# Altium PCB RFD900X Holder.PcbDoc
Units mm, origin at the board's own origin, x right, y up, seen from the top; angles counter-clockwise.
Board outline 30 x 35.1 mm, 2 copper layers (Top Layer, Bottom Layer), stack 1.1 mm thick; 16 components, 18 nets, 79 pads, 89 vias.
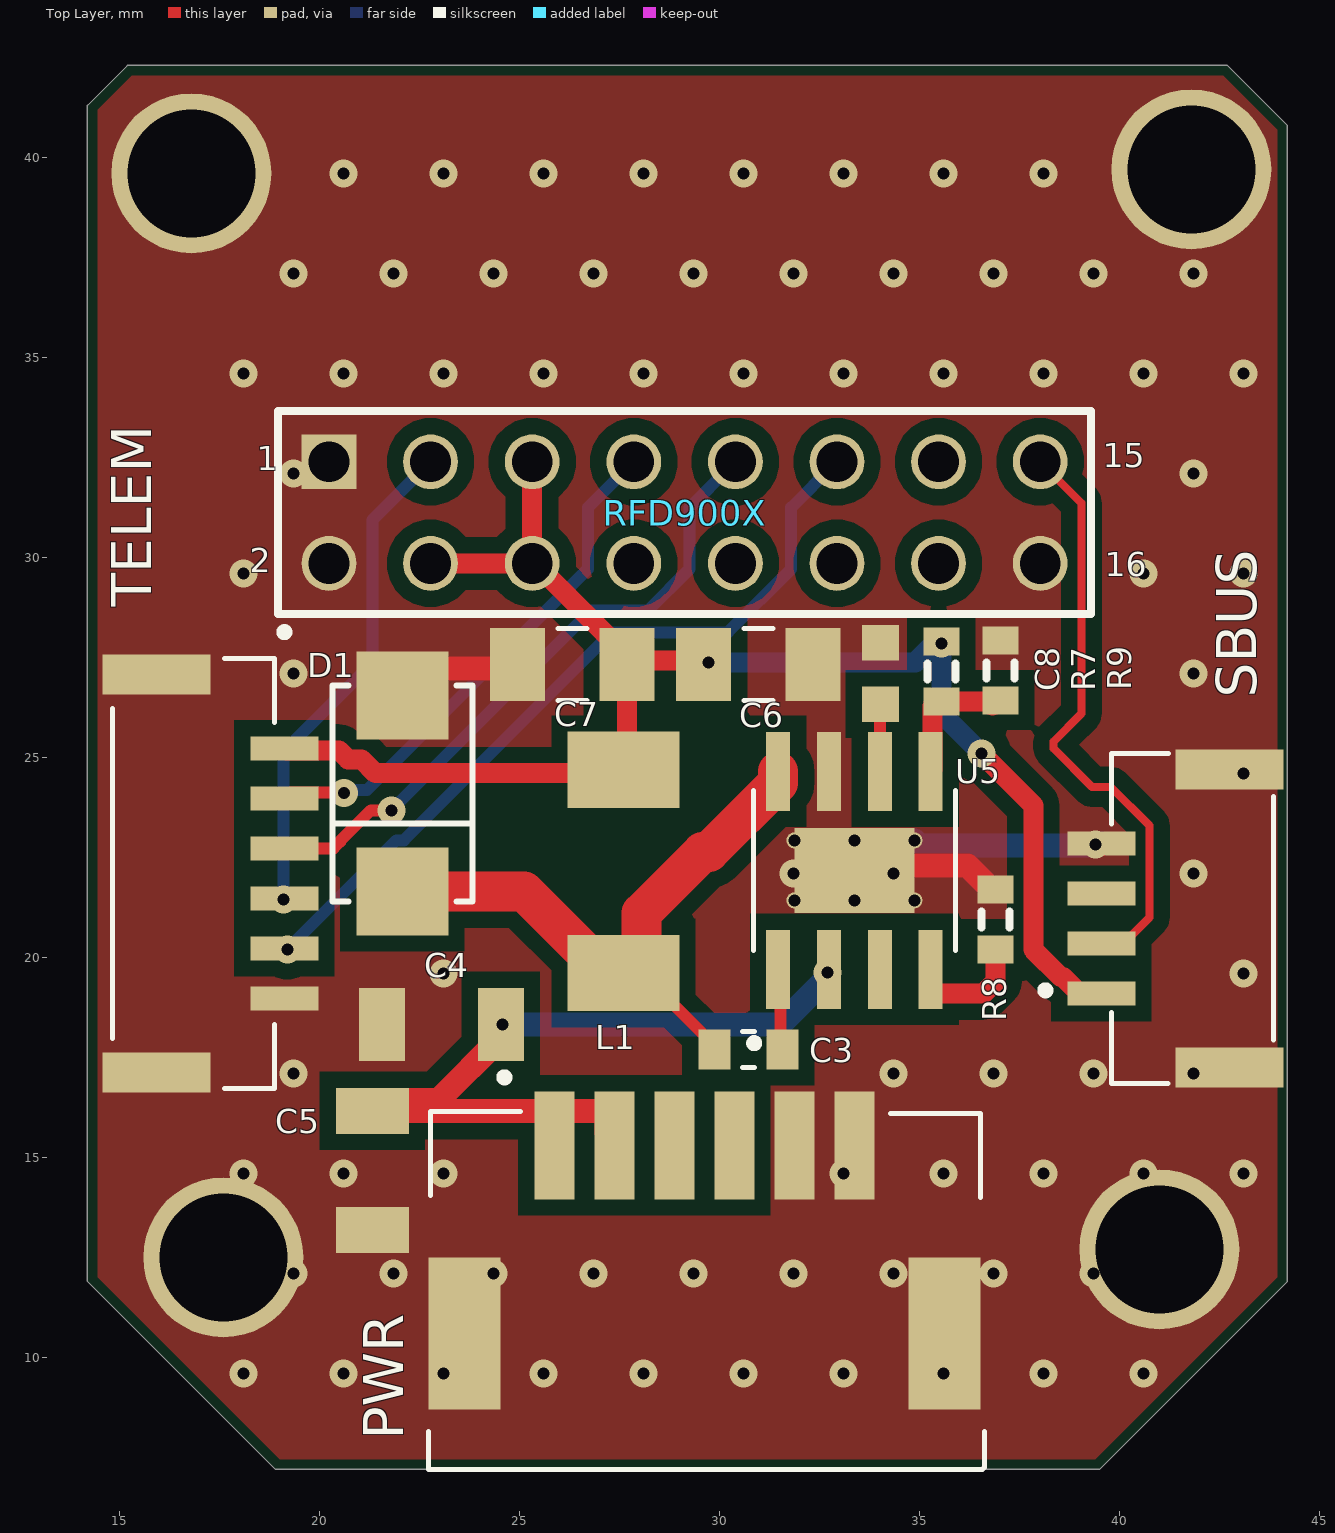
[diagram p0: Top Layer view]
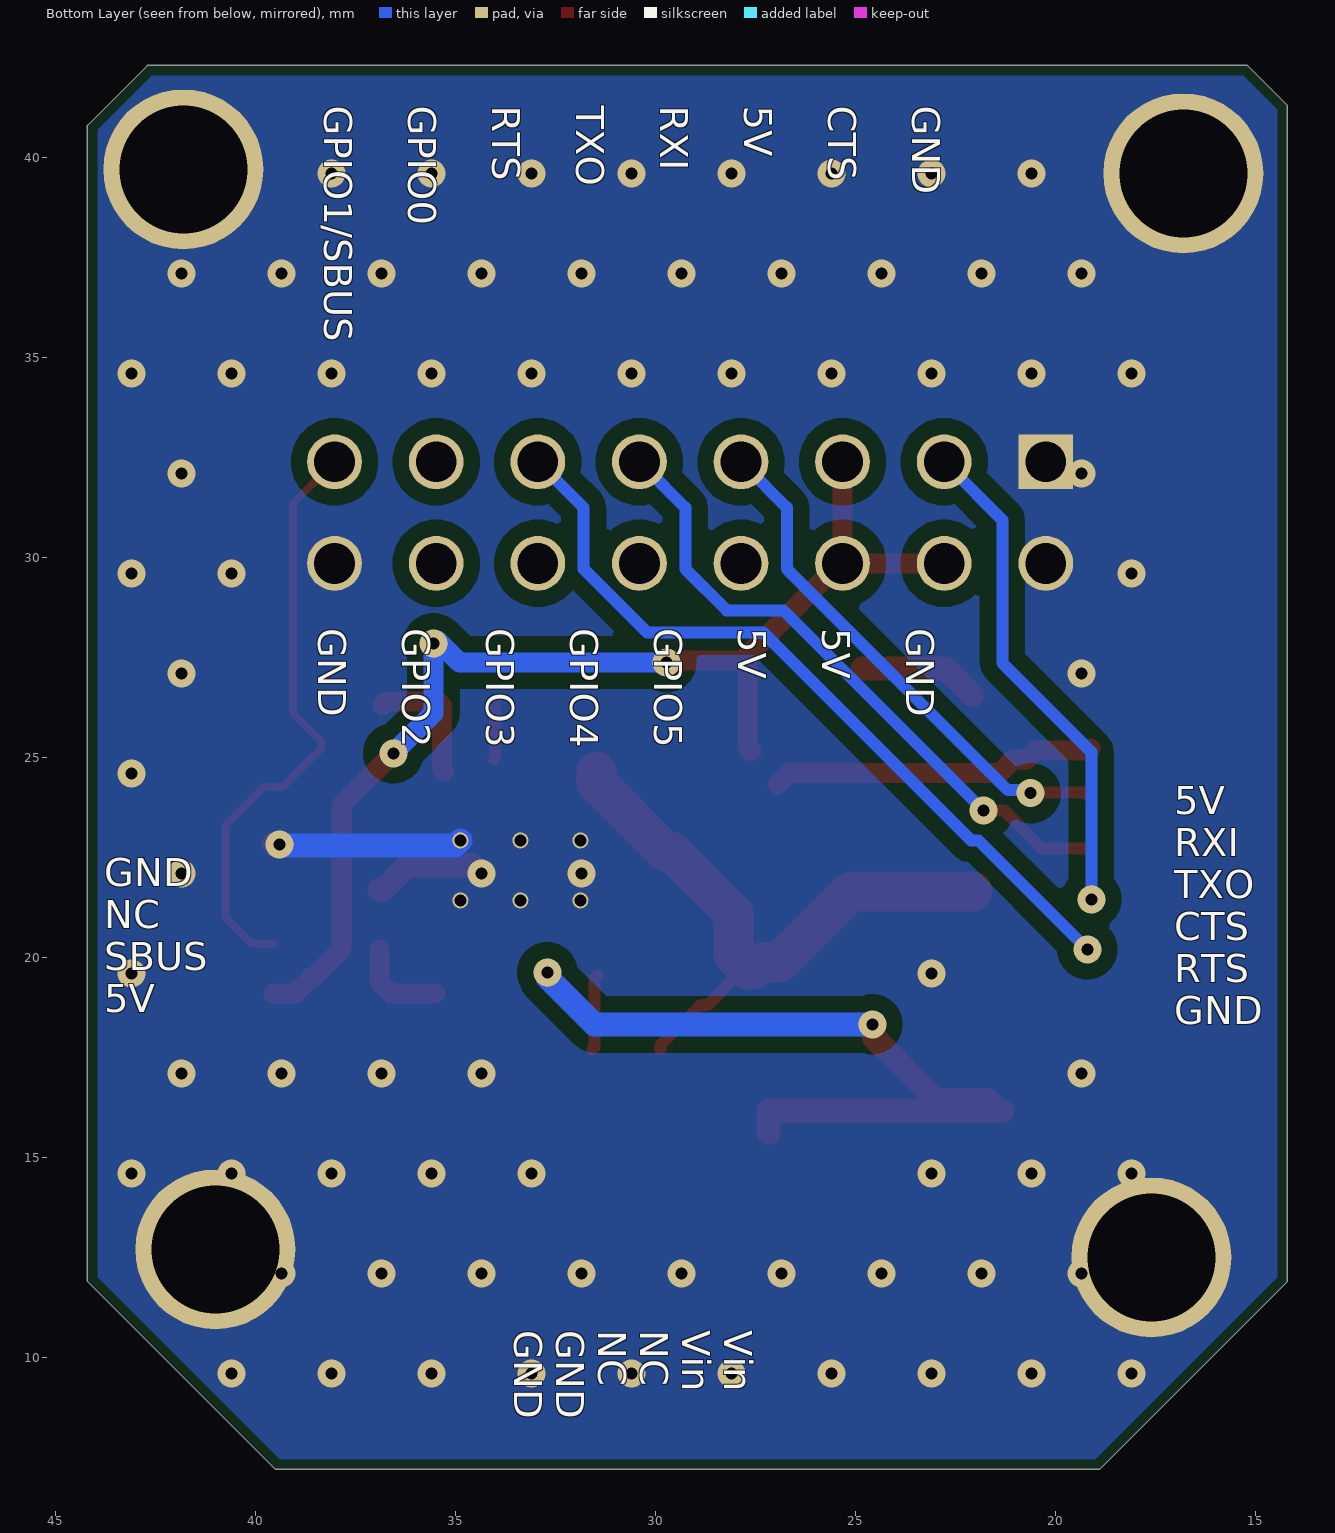
[diagram p1: Bottom Layer view, seen from below]
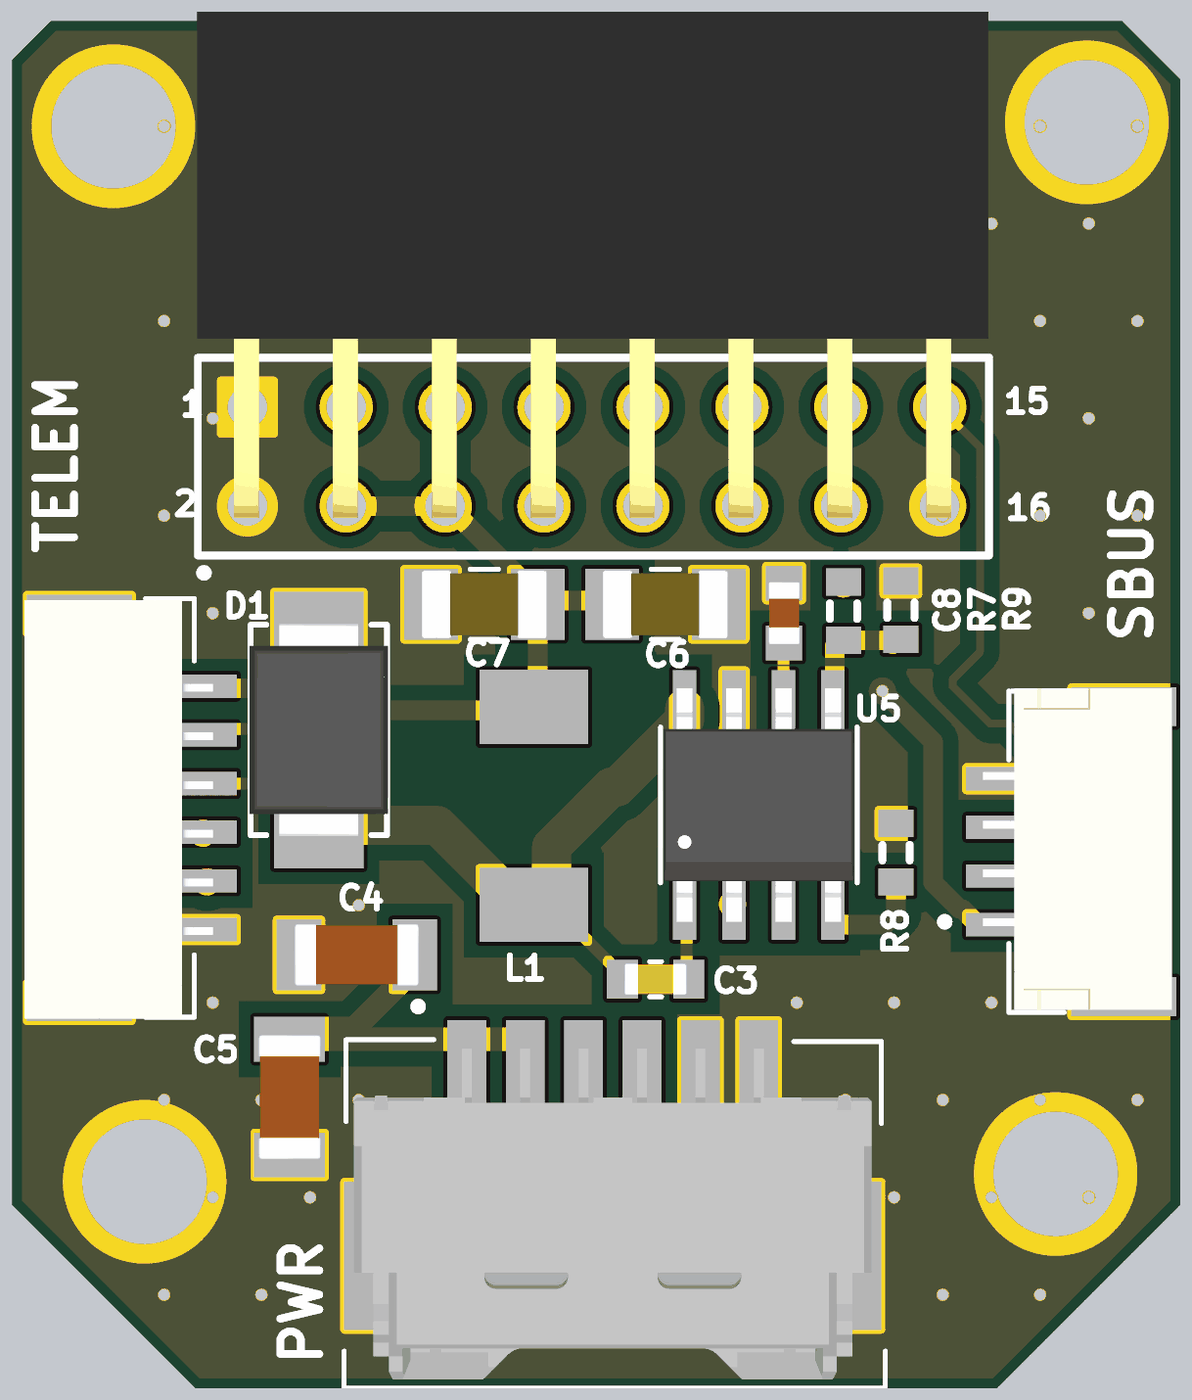
[diagram p2: 3D render of the assembled board from above, using the file's embedded part models]

## Layer stack, top to bottom
Top Solder: solder mask 0.0102, Solder Resist, Dk 3.5
Top Layer: signal copper 0.05
Dielectric 1: dielectric 1, FR-4, Dk 4.8
Bottom Layer: signal copper 0.05
Bottom Solder: solder mask 0.0102, Solder Resist, Dk 3.5

## Board outline
14.2,11.9 14.2,41.3 15.2,42.3 42.7,42.3 44.2,40.8 44.2,11.9 39.5,7.2 18.9,7.2

## Design rules (kind name [scope] priority, off if disabled: settings)
BoardOutlineClearance [All] p1: gap=0.25 ignorepadtopadclearanceinfootprint=FALSE
Clearance [All] p1: gap=0.25 ignorepadtopadclearanceinfootprint=FALSE except(0.4: Arc-Fill Arc-Poly Arc-Region Track-Fill Track-Poly Track-Region SMDPad-Fill SMDPad-Poly SMDPad-Region THPad-Fill THPad-Poly THPad-Region Via-Fill Via-Poly Via-Region Fill-Fill Fill-Poly Fill-Region Poly-Poly Poly-Region Region-Region)
ComponentClearance [All] p1: gap=0.254 collisioncheckmode=3 verticalgap=0 showdistances=FALSE
FanoutControl Fanout_SOIC [IsSOIC] p3: bgadir=Out bgaviamode=Closest fanoutstyle=Auto fanoutdirection=Alternating viagrid=0.025 // Fanout_SOIC (Default Rule)
FanoutControl Fanout_Small [(CompPinCount < 5)] p4: bgadir=Out bgaviamode=Closest fanoutstyle=Auto fanoutdirection=OutThenIn viagrid=0.025 // Fanout_Small (Default Rule)
FanoutControl Fanout_Default [All] p5: bgadir=In bgaviamode=Closest fanoutstyle=Auto fanoutdirection=Alternating viagrid=0.025 // Fanout_Default (Default Rule)
HoleSize [All] p1: absolutevalues=TRUE maxlimit=4.5 minlimit=0.3 maxpercent=80.000 minpercent=20.000
HoleToHoleClearance [All] p1: gap=0.4 allowstackedmicrovias=TRUE
MinimumSolderMaskSliver [All] p1: minsoldermaskwidth=0.15
PlaneClearance [All] p1: clearance=0.2
PlaneConnect [All] p1: planeconnectstyle=Relief reliefexpansion=0.5 reliefentries=4 reliefconductorwidth=0.2 reliefairgap=0.25
PolygonConnect PolygonConnect_2 [InNet('Vin')] p1: connectstyle=Direct reliefconductorwidth=0.254 reliefentries=4 polygonreliefangle="90 Angle" airgapwidth=0.254
PolygonConnect PolygonConnect_1 [InNet('GND')] p2: connectstyle=Direct reliefconductorwidth=0.254 reliefentries=4 polygonreliefangle="90 Angle" airgapwidth=0.254
PolygonConnect [All] p3: connectstyle=Direct reliefconductorwidth=0.3 reliefentries=4 polygonreliefangle="90 Angle" airgapwidth=0.16
RoutingCorners [All] p1: cornerstyle=45-Degree minsetback=2.5 maxsetback=2.5
RoutingPriority [All] p1 off: routingpriority=0
RoutingVias [All] p1: holewidth=0.3 width=0.7 viastyle="Through Hole" minholewidth=0.3 minwidth=0.7 maxholewidth=0.8 maxwidth=1.2
SilkToSilkClearance [All] p1: silktosilkclearance=0
SilkToSolderMaskClearance [IsPad] p1: minsilkscreentomaskgap=0 clearancetoexposedcopper=TRUE
SolderMaskExpansion [All] p1: expansion=0.1 istentingtop=FALSE
Width [All] p1: maxlimit=5 minlimit=0.17 preferedwidth=0.3
17 further rules are at their usual default settings.

## Classes and differential pairs
component class "RFD900X Holder": PWR RFD900X SBUS TELEM
component class DCDC-LMR16030: C3 C4 C5 C6 C7 C8 D1 L1 R7 R8 R9 U5

## Components (designator, comment, footprint, x,y, rotation, side; value= is the part's Value field where it differs from the comment)
C3 "GX035C104MAT2-500" *CAPC1608X90 30.725,17.7 r0 top value=0.1u
C4 "GRM31CR71H225KA88L" *CAP3216X125N 23.05,18.325 r180 top value=2.2u
C5 "GRM31CR71H225KA88L" *CAP3216X125N 21.325,14.675 r270 top value=2.2u
C6 "GRM31CR61A476KE15L" *CAPC3216X125N 30.975,27.325 r180 top value=47u
C7 "GRM31CR61A476KE15L" *CAPC3216X125N 26.325,27.325 r0 top value=47u
C8 "GRM188R71C105KA12D" CAPC1608X90N 34.025,27.1 r270 top value=1u
D1 "SK56" *SMB_P6SMB62AT3G(Primary) 22.075,24.1 r270 top
L1 "IHLP2020BZER100M01" IHLP 27.6,22.15 r270 top
PWR "502585-0670" MOLEX_502585-0670 29.625,15.1 r0 top
R7 "RC0603FR-0756KL" J1-0603 35.55,27.15 r90 top value=56k
R8 "RC0603FR-0756KL" J1-0603 36.9,20.95 r270 top value=56k
R9 "RC0603FR-0710KL" J1-0603 37.025,27.175 r270 top value=10k
RFD900X "2.54mm 2x8R C52105" "2.54mm 2x8R" 20.24,29.85 r0 top
SBUS "SM04B-GHS-TB(LF)(SN)-" JST_SM04B-GHS-TB(LF)(SN)- 41.825,20.975 r90 top
TELEM "SM06B-GHS-TB(LF)(SN)" JST_SM06B-GHS-TB(LF)(SN) 17.25,22.1 r270 top
U5 "LMR16030SDDAR" "*SOIC127P600X170-9N - duplicate" 33.375,22.175 r90 top

## Footprints (in the part's own frame and the unit in brackets; to place one, negate y for a bottom-side part, rotate by r counter-clockwise, add the part's x,y. Pads: shape width x height; smd on the part's side, far side on the other; paste and mask are expansions set on the pad)
"2.54mm 2x8R" [mm]
  rect 1.37x1.37 hole 1.02: 01(0,2.54)
  round 1.37 hole 1.02: 02(0,0) 03(2.54,2.54) 04(2.54,0) 05(5.08,2.54) 06(5.08,0) 07(7.62,2.54) 08(7.62,0) 09(10.16,2.54) 10(10.16,0) 11(12.7,2.54) 12(12.7,0) 13(15.24,2.54) 14(15.24,0) 15(17.78,2.54) 16(17.78,0)
  silkscreen extent -1.27,-1.27 19.05,3.81, body extent -1.29,-0.31 19.03,12.69, height 5
*CAP3216X125N [mm]
  rect 1.15x1.82 smd: 1(-1.485,0) 2(1.485,0)
  body extent -1.6,-0.8 1.6,0.8, height 1.22
*CAPC1608X90 [mm]
  rect 0.8x1 smd: 1(-0.85,0) 2(0.85,0)
  silkscreen extent -0.15,-0.45 0.15,0.45, body extent -0.8,-0.4 0.8,0.41, height 0.88
*CAPC3216X125N [mm]
  rect 1.38x1.82 smd: 1(-1.369,0) 2(1.369,0)
  silkscreen extent -0.36,-0.9 0.36,0.9, body extent -1.6,-0.87 1.6,0.87, height 1.71
*SMB_P6SMB62AT3G(Primary) [mm]
  rect 2.2x2.3 smd: A(-2.45,0) C(2.45,0)
  silkscreen extent -2.7,-1.75 2.7,1.75, body extent -2.72,-1.78 2.72,1.78, height 2.49
"*SOIC127P600X170-9N - duplicate" [mm]
  rect 1.97x0.6 smd: 1(-2.475,1.905) 2(-2.475,0.635) 3(-2.475,-0.635) 4(-2.475,-1.905) 5(2.475,-1.905) 6(2.475,-0.635) 7(2.475,0.635) 8(2.475,1.905)
  round 0.4 hole 0.3: 9(-0.75,1.5) 9(-0.75,0) 9(-0.75,-1.5) 9(0.75,1.5) 9(0.75,0) 9(0.75,-1.5)
  rect 2.13x3 smd: 9(0,0)
  silkscreen extent -4.42,-2.53 2,2.6, body extent -3,-2.45 3,2.45, height 1.69
CAPC1608X90N [mm]
  rect 0.89x0.93 smd: 1(-0.77,0) 2(0.77,0)
  body extent -0.8,-0.4 0.8,0.4, height 0.9
IHLP [mil]
  rect 75x110 smd: 1(-100,0) 2(100,0)
  body extent -100,-100 100,100, height 79
J1-0603 [mm] "Chip Resistor, Body 1.6x0.8mm, IPC High Density"
  rect 0.7x0.9 smd: 1(-0.75,0) 2(0.75,0)
  silkscreen extent -0.2,-0.35 0.2,0.35, body extent -0.85,-0.48 0.85,0.48, height 0.9
JST_SM04B-GHS-TB(LF)(SN)- [mm]
  rect 0.6x1.7 smd: 1(-1.875,2.275) 2(-0.625,2.275) 3(0.625,2.275) 4(1.875,2.275)
  rect 1x2.7 smd: SH1(-3.725,-0.925) SH2(3.725,-0.925)
  silkscreen extent -4.13,-2.02 4.13,3.77, body extent -4.06,-2.16 4.19,2.69, height 4.35
JST_SM06B-GHS-TB(LF)(SN) [mm]
  rect 0.6x1.7 smd: 1(-3.125,1.875) 2(-1.875,1.875) 3(-0.625,1.875) 4(0.625,1.875) 5(1.875,1.875) 6(3.125,1.875)
  rect 1x2.7 smd: S1(-4.975,-1.325) S2(4.975,-1.325)
  silkscreen extent -6.13,-2.42 5.38,1.97, body extent -5.33,-2.74 5.42,2.11, height 4.25
MOLEX_502585-0670 [mm]
  rect 1x2.7 smd: 1(-3.75,0.2) 2(-2.25,0.2) 3(-0.75,0.2) 4(0.75,0.2) 5(2.25,0.2) 6(3.75,0.2)
  rect 1.8x3.8 smd: P1(-6,-4.5) P2(6,-4.5)
  silkscreen extent -6.9,-7.9 7,2, body extent -6.65,-7.68 6.65,0.82, height 6.41

## Part data
C3: "Cap Thin Film 0.1uf 50v 0603", Package="0603 AVX", ChipDip_Link=https://www.chipdip.ru/product0/9000410929, ChipDip_Price=10, MF=AVX, MP=GX035C104MAT2-500, Pacage Metric=1608, Price=0.024, SnapEDA_Link=https://www.snapeda.com/parts/GX035C104MAT2-500/AVX/view-part/?ref=snap, Type=SMD
C4 C5: "1206 2.2 uF 50 V В±10% Tolerance X7R SMT Multilayer Ceramic Capacitor", Package="1206 Murata", ChipDip_Link=https://www.chipdip.ru/product/grm31cr71h225ka88l, ChipDip_Price=12, MF="Murata Electronics", MP=GRM31CR71H225KA88L, Price=0.16, SnapEDA_Link=https://www.snapeda.com/parts/GRM31CR71H225KA88L/Murata%20Electronics%20North%20America/view-part/?ref=snap, Type=SMD
C6 C7: "Multilayer Ceramic Capacitor, GRM Series, 47 - F, - 10%, X5R, 10 V, 1206 [3216 Metric]", Package="1206 Murata Electronics", ChipDip_Link=https://www.chipdip.ru/product0/8001779807, ChipDip_Price=11, MF="Murata Electronics", MP=GRM31CR61A476KE15L, Price=0.2, SnapEDA_Link=https://www.snapeda.com/parts/GRM31CR61A476KE15L/Murata%20Electronics%20North%20America/view-part/?ref=snap, Type=SMD
C8: "SMD Capacitor X7R(EIA) with Capacitance: 1.0uF Tol. 10%. Rated Voltage: 16Vdc", Package=0603, ChipDip_Link=https://www.chipdip.ru/product/grm188r71c105ka12d, ChipDip_Price=15, HelpURL=https://static.chipdip.ru/lib/428/DOC005428493.pdf, MF="Murata Electronics", MP=GRM188R71C105KA12D, Pacage Metric=1608, Price=0.048, SnapEDA_Link=https://www.snapeda.com/parts/GRM188R71C105KA12D/Murata%20Electronics%20North%20America/view-part/228340/?ref=snap, Type=SMD
D1: "Диод Шоттки 5А 60В [SMB / DO-214AA]", Package="DO-214 Littelfuse", ChipDip_Link=https://www.chipdip.ru/product/sk56, MF="Littelfuse Inc.", MP=SK56, Price=0.249, SnapEDA_Link=https://www.snapeda.com/parts/P6SMB62AT3G/Littelfuse%20Inc./view-part/?ref=snap, Type=SMD
L1: "10ÂµH Shielded Molded Inductor 2.3A 199mOhm Max Nonstandard", Package="Nonstandard Vishay", ChipDip_Link=https://www.chipdip.ru/product/ihlp2020bzer100m11-inductor-ihlp-smd-2020-10, HelpURL=http://www.vishay.com/docs/34253/ihlp-2020bz-01.pdf, MF="Vishay Dale", MP=IHLP2020BZER100M01, SnapEDA_Link=https://www.snapeda.com/parts/IHLP2020BZER100M01/Vishay%20Dale/view-part/44808/?ref=snap, Type=SMD
PWR: "1.50mm Pitch, CLIK-Mate PCB Receptacle, Single Row, Surface Mount, Right-Angle, Tin Plating, Positive Lock, 6 Circuits, Natural", Package=None, MF=Molex, MP=502585-0670, SnapEDA_Link=https://www.snapeda.com/parts/502494-0670/Molex/view-part/?ref=snap, System=Connector, Type=SMD
R7 R8: "56 kOhms ±1% 0.1W, 1/10W Chip Resistor 0603 (1608 Metric) Moisture Resistant Thick Film", Package=R0603, ChipDip_Link=https://www.chipdip.ru/product0/9000079754, HelpURL=https://www.yageo.com/upload/media/product/productsearch/datasheet/rchip/PYu-RC_Group_51_RoHS_L_10.pdf, MF="Yageo or NXP", MP=RC0603FR-0756KL, Pacage Metric=1608, Type=SMD
R9: "10 kOhms 1 0.1 W 1 10 W Chip Resistor 0603 1608 Metric Thick Film", Package=R0603, ChipDip_Link=https://www.chipdip.ru/product0/9000079736, HelpURL=https://www.yageo.com/upload/media/product/productsearch/datasheet/rchip/PYu-RC_Group_51_RoHS_L_10.pdf, MF="Yageo or NXP", MP=RC0603FR-0710KL, Pacage Metric=1608, Price=0.002, SnapEDA_Link=https://www.snapeda.com/parts/RC0603FR-0710KL/Yageo/view-part/?ref=dk&t=RC0603FR-0710KL&con_ref=None, Type=SMD
RFD900X: Package=None, HelpURL=https://item.szlcsc.com/53119.html, MF=BOOMELE, MP=C52105
SBUS: "Connector Header Surface Mount, Right Angle 4 position 0.049 _1.25mm_", Package=None, ChipDip_Link=https://www.chipdip.ru/product/sm04b-ghs-tb-lf-sn-gh-1.25mm-header-side-ent, HelpURL=http://www.farnell.com/datasheets/2082975.pdf, MF="JST Sales", MP=SM04B-GHS-TB(LF)(SN), SnapEDA_Link=https://www.snapeda.com/parts/SM04B-GHS-TB%28LF%29%28SN%29-/JST%20Sales%20America%20Inc./view-part/2759740/?ref=snap, System=Connector
TELEM: "Connector Header Surface Mount, Right Angle 6 position 0.049\" (1.25mm)", Package=None, Availability=Unavailable, ChipDip_Link=https://www.chipdip.ru/product1/8002005407, HelpURL=http://www.farnell.com/datasheets/2082975.pdf, MF="JST Sales", MP=SM06B-GHS-TB_LF__SN_, Price=None, SnapEDA_Link=https://www.snapeda.com/parts/SM06B-GHS-TB%28LF%29%28SN%29/JST%20Sales%20America%20Inc./view-part/817690/?ref=snap, System=Connector
U5: "LMR16030SDDAR, Conv DC-DC 4.3V to 60V Step Down Single-Out 1V to 50V 3A Automotive 8-Pin HSOP EP T/R", Package="PowerSOIC-8 Texas Instruments", ChipDip_Link=https://www.chipdip.ru/product1/8003448566, HelpURL=https://www.ti.com/lit/ds/symlink/lmr16030.pdf, MF="Texas Instruments", MP=LMR16030SDDAR, SnapEDA_Link=https://www.snapeda.com/parts/TPS54560DDA/Texas%20Instruments/view-part/?ref=snap, Type=SMD

## Free pads (board coordinates)
  round 4 hole 3.2: ""(16.8,39.6) ""(17.6,12.5) ""(41,12.7) ""(41.8,39.7)

## Via types
v1: diameter 0.7, hole 0.3, Top Layer to Bottom Layer, tented both sides, 89 vias

## Nets (pads, with @x,y where several pads share a name; then routed paths per layer and width w, separated by ;. In a path a pad name is that pad's centre, name@x,y a point inside that pad or via, vN(x,y) a via of type N, cw(c..) or ccw(c..) an arc to the next point about the centre after c; other vN are vias at no path point)
5V: C6.2 C7.2 L1.1 R7.2 RFD900X.04 RFD900X.05 RFD900X.06 SBUS.1 TELEM.1 | length 37.6
  Top Layer w0.5: TELEM.1 19.175,25.175 20.493,25.175 20.718,24.95 21.052,24.95 21.399,24.604 26.671,24.604 L1.1@26.95,24.325 ; RFD900X.04 RFD900X.06 25.389,29.85 27.725,27.514 C7.2@27.725,27.35 ; RFD900X.06@25.3,29.875 25.32,29.895 RFD900X.05 ; L1.1@27.6,25.15 27.694,25.244 C7.2 ; C7.2@27.925,27.425 29.506,27.425 C6.2 29.675,27.325 v1(29.725,27.375) ; v1(36.55,25.1) 37.85,23.8 37.85,20.193 38.539,19.504 38.596,19.504 39,19.1 SBUS.1
  Bottom Layer w0.5: v1(29.725,27.375) 34.9,27.375 v1@35.45,27.925 ; v1(35.55,27.85) 35.55,26.1 v1(36.55,25.1)
CTS: RFD900X.03 TELEM.4 | length 12.6
  Top Layer w0.3: v1(19.1,21.45) TELEM.4
  Bottom Layer w0.3: v1(19.1,21.45) 19.1,25.134 21.325,27.359 21.325,30.935 22.64,32.25 RFD900X.03@22.9,32.25
FB: R7.1 R9.2 U5.5 | length 3.2
  Top Layer w0.5: U5.5 35.33,24.7 35.33,26.28 35.425,26.375 R7.1@35.5,26.375 ; R7.1 36.725,26.4 R9.2@36.825,26.3
GND: C4.2 C5.2 C6.1 C7.1 C8.1 D1.A pad. PWR.5 PWR.6 PWR.P1 PWR.P2 R8.1 R9.1 RFD900X.01 RFD900X.02 RFD900X.16 SBUS.4 SBUS.SH1 SBUS.SH2 TELEM.6 TELEM.S1 TELEM.S2 U5.7 U5.9 | length 10.3
  Top Layer w0.6: D1.A 22.75,27.225 C7.1@24.825,27.225 ; U5.9@34.575,22.3 36.2,22.3 36.8,21.7 R8.1 ; v1(39.4,22.825) 39.525,22.825 SBUS.4
  Bottom Layer w0.6: U5.9@34.875,22.925 35,22.8 v1@39.4,22.8
  other v1: 18.1,9.6 20.6,9.6 23.1,9.6 25.6,9.6 28.1,9.6 30.6,9.6 33.1,9.6 35.6,9.6 38.1,9.6 40.6,9.6 19.35,12.1 21.85,12.1 24.35,12.1 26.85,12.1 29.35,12.1 31.85,12.1 34.35,12.1 36.85,12.1 39.35,12.1 41.85,12.1 18.1,14.6 20.6,14.6 23.1,14.6 33.1,14.6 35.6,14.6 38.1,14.6 40.6,14.6 43.1,14.6 19.35,17.1 34.35,17.1 36.85,17.1 39.35,17.1 41.85,17.1 23.1,19.6 43.1,19.6 31.85,22.1 34.35,22.1 41.85,22.1 43.1,24.6 19.35,27.1 41.85,27.1 18.1,29.6 38.1,29.6 40.6,29.6 43.1,29.6 19.35,32.1 41.85,32.1 18.1,34.6 20.6,34.6 23.1,34.6 25.6,34.6 28.1,34.6 30.6,34.6 33.1,34.6 35.6,34.6 38.1,34.6 40.6,34.6 43.1,34.6 19.35,37.1 21.85,37.1 24.35,37.1 26.85,37.1 29.35,37.1 31.85,37.1 34.35,37.1 36.85,37.1 39.35,37.1 41.85,37.1 18.1,39.6 20.6,39.6 23.1,39.6 25.6,39.6 28.1,39.6 30.6,39.6 33.1,39.6 35.6,39.6 38.1,39.6 40.6,39.6 43.1,39.6
GPIO0: RFD900X.13
GPIO1: RFD900X.15 SBUS.2 | length 14.7
  Top Layer w0.2: RFD900X.15@38.125,32.275 38.135,32.275 39.055,31.355 39.055,26.098 38.35,25.393 38.35,25.227 39.316,24.261 39.784,24.261 40.75,23.295 40.75,21 40.1,20.35 SBUS.2
GPIO2: RFD900X.14
GPIO3: RFD900X.12
GPIO4: RFD900X.10
GPIO5: RFD900X.08
NetC3_1: C3.1 D1.C L1.2 U5.8 | length 15.5
  Top Layer w0.3: L1.2@28,19.5 28.692,18.808 28.868,18.808 29.875,17.8 C3.1
  Top Layer w1: D1.C 25.116,21.65 26.891,19.875 L1.2@27.35,19.875 ; L1.2@27.525,19.7 27.691,19.7 28.053,20.063 28.053,21.103 29.584,22.634 29.739,22.634 31.47,24.365 U5.8
NetC3_2: C3.2 U5.1 | length 1.9
  Top Layer w0.3: U5.1@31.45,19.55 31.523,19.477 31.523,17.753 C3.2
NetC8_2: C8.2 U5.6 | length 1.4
  Top Layer w0.3: C8.2 34.01,26.315 34.01,24.99 U5.6@34.05,24.95
NetR8_2: R8.2 U5.4 | length 2.3
  Top Layer w0.5: U5.4@35.5,19.1 36.607,19.1 36.9,19.393 R8.2
RTS: RFD900X.11 TELEM.5 | length 19.7
  Top Layer w0.3: TELEM.5 19.175,20.225 v1(19.2,20.2)
  Bottom Layer w0.3: v1(19.2,20.2) 21.925,22.925 22.111,22.925 27.311,28.125 30.209,28.125 31.792,29.708 31.792,31.242 32.875,32.325 RFD900X.11@32.9,32.325
RXI: RFD900X.07 TELEM.2 | length 13.1
  Top Layer w0.3: TELEM.2 19.275,24.125 20.325,24.125 20.337,24.137 20.586,24.137 v1(20.617,24.106)
  Bottom Layer w0.3: v1(20.617,24.106) 20.693,24.183 21.187,24.183 26.712,29.708 26.712,31.242 27.795,32.325 RFD900X.07@27.85,32.325
TXO: RFD900X.09 TELEM.3 | length 16.1
  Top Layer w0.3: TELEM.3 20.349,22.725 20.525,22.901 20.525,22.916 21.284,23.675 v1(21.8,23.675)
  Bottom Layer w0.3: v1(21.8,23.675) 26.8,28.675 28.219,28.675 29.252,29.708 29.252,31.242 30.26,32.25 RFD900X.09@30.4,32.25
Vin: C4.1 C5.1 PWR.1 PWR.2 U5.2 | length 19.3
  Top Layer w0.6: C5.1 27.175,16.16 PWR.2@27.175,15.625 ; C5.1@21.45,16.2 21.685,16.435 22.98,16.435 24.535,17.99 C4.1 v1(24.575,18.325)
  Bottom Layer w0.6: v1(24.575,18.325) 31.525,18.325 32.7,19.5 v1(32.7,19.625)
pads on no net: PWR.3 PWR.4 SBUS.3 U5.3

## Polygon pours and split planes (outlines as drawn)
GND on Top Layer "NONET_L-01_P-001" (solid, remove dead copper, pour order 0): 52.75,42.9 54.25,41.4 54.25,7.1 51.15,4 14.65,4 7.95,10.7 7.95,40.4 13.55,46 47.25,46
GND on Bottom Layer "NONET_L-01_P-001" (solid, remove dead copper, pour order 1): 11.175,43.45 45.275,43.45 50.575,38.15 50.575,9.45 47.075,5.95 14.175,5.95 9.475,10.65

## Silkscreen, mask and mechanical layers (free items; w line width, h text height)
Bottom Overlay:
  text "GND /  / CTS /  / 5V /  / RXI /  / TXO /  / RTS /  / GPIO0 /  / GPIO1/SBUS" at 38.275,41.296 h0.7 r90
  text "GND /  / 5V /  / 5V /  / GPIO5 /  / GPIO4 /  / GPIO3 /  / GPIO2 /  / GND" at 38.425,28.225 h0.7 r90
  text "GND / NC / SBUS / 5V" at 43.775,18.625 h0.7
  text "5V / RXI / TXO / CTS / RTS / GND" at 17.031,18.325 h0.7
  text "Vin / Vin / NC / NC / GND / GND" at 33.525,10.681 h0.7 r90
Mechanical 2:
  lines w0.254: 14.2,11.9 14.2,41.3 15.2,42.3 15.4,42.3 42.7,42.3 44.2,40.8 44.2,11.9 39.5,7.2 18.9,7.2 14.2,11.9

## Text inside footprints (layer, text, board x,y; h text height)
RFD900X: Top Overlay "1" at 18.44,32.175 h0.6; Top Overlay "2" at 18.265,29.625 h0.6; Top Overlay "15" at 39.59,32.25 h0.6; Top Overlay "16" at 39.64,29.525 h0.6